# EAGLE board M_D_ext_power_1A (EAGLE 9.6.2)
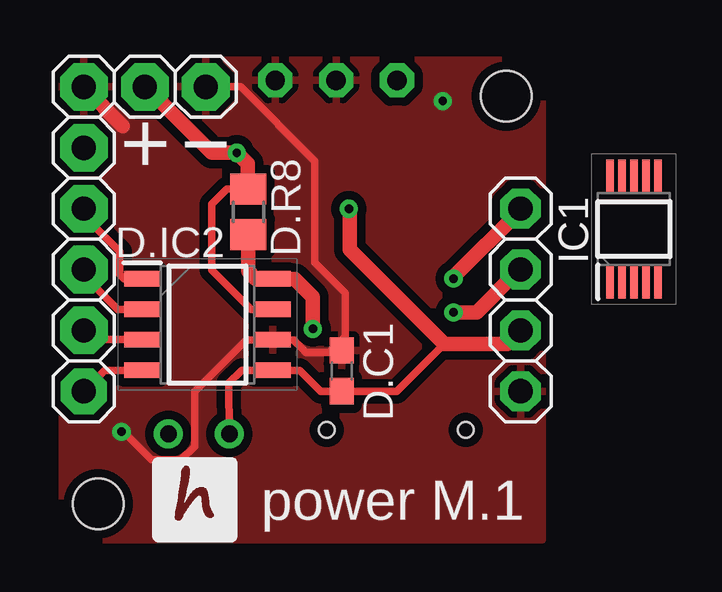
[diagram p0: board, top side]
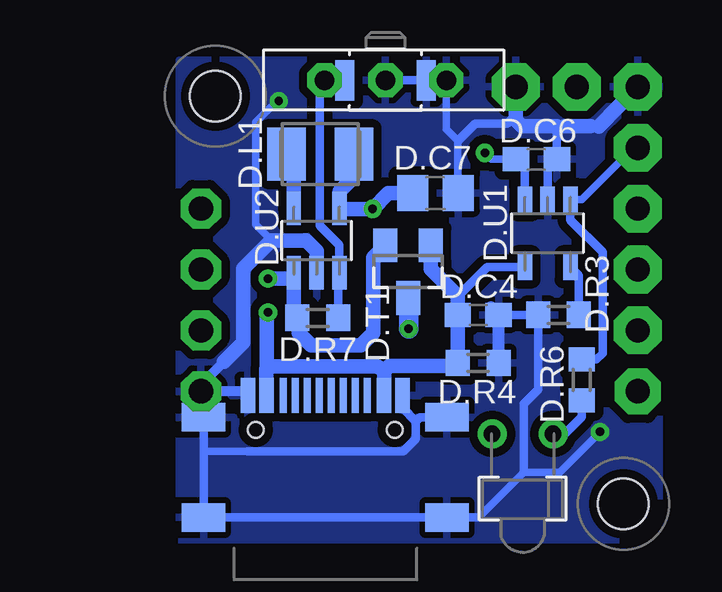
[diagram p1: board, bottom side, seen from below]

No outline drawn. Coordinates in mm, seen from the top.
Copper layers (1*16): Top 0.035mm / dielectric 1.5mm / Bottom 0.035mm
Design rules "default *": minimum track width 10mil, minimum drill 0.35mm, track to track 6mil, track to pad 6mil, pad to pad 6mil, via to via 10mil, smd to smd 10mil, copper to edge 15mil, drill to drill 15mil, minimum pad ring 10mil, minimum via ring 8mil, stop-mask expansion 4mil, vias tented up to drill 0mil, thermal gap 10mil
Holes 2.1 mm at 2,2 19,19

## Footprints (pad centres in the part's own frame; a part is rotated, then mirrored left to right if it is on the bottom)
C0603 = smd 1.1 x 1: 1 -0.85,0; 2 0.85,0
C0805 = smd 1.3 x 1.5: 1 -0.95,0; 2 0.95,0
LED_1.8 = drill 0.7: 1 -1.27,-0.4; 2 1.27,-0.4
SOIC127P600X175-8N = smd 1.528 x 0.65: 1 -2.711,1.905; 2 -2.711,0.635; 3 -2.711,-0.635; 4 -2.711,-1.905; 5 2.711,-1.905; 6 2.711,-0.635; 7 2.711,0.635; 8 2.711,1.905
1X06 = drill 1.016 pad 1.93 octagon: 1 -6.35,0 | drill 1.016 pad 1.981 octagon: 2 -3.81,0; 3 -1.27,0; 4 1.27,0; 5 3.81,0; 6 6.35,0
1X04 = drill 1.016 pad 1.676 octagon: 1 -3.81,0; 2 -1.27,0; 3 1.27,0; 4 3.81,0
L3230M = smd 1.6 x 2.2: 1 -1.4,0; 2 1.4,0
1X02 = drill 1.016 pad 1.981 octagon: 1 -1.27,0; 2 1.27,0
SWITCH = drill 0.8 pad 1.422 octagon: P$1 -2.54,0; P$2 0,0; P$3 2.54,0 | smd 0.8 x 1.7: P$4 -1.7,0; P$5 1.7,0
R0603 = smd 1 x 1.1: 1 -0.85,0; 2 0.85,0
R0805 = smd 1.3 x 1.5: 1 -0.95,0; 2 0.95,0
SOT23 = smd 1 x 1.4: D 0,1.1; G -0.95,-1.1; S 0.95,-1.1
SOT23-5 = smd 0.6 x 1.1: 1 -0.95,-1.45; 2 0,-1.45; 3 0.95,-1.45; 4 0.95,1.35; 5 -0.95,1.35
SOT32-5 = smd 0.6 x 1.4: BP 0.95,1.35; GND 0,-1.35; SHDN 0.95,-1.35; VIN -0.95,-1.35; VOUT -0.95,1.35
SOP50P490X110-10N = smd 1.4 x 0.3: 1 -2.2,1; 2 -2.2,0.5; 3 -2.2,0; 4 -2.2,-0.5; 5 -2.2,-1; 6 2.2,-1; 7 2.2,-0.5; 8 2.2,0; 9 2.2,0.5; 10 2.2,1
USB-C = smd 0.6 x 1.45: A1B12 -3.235,3.825; A4B9 -2.46,3.825; B1A12 3.215,3.825; B4A9 2.44,3.825 | smd 0.3 x 1.45: A5 -1.26,3.825; A6 -0.26,3.825; A7 0.24,3.825; A8 1.24,3.825; B5 1.74,3.825; B6 0.74,3.825; B7 -0.76,3.825; B8 -1.76,3.825 | smd 1.8 x 1.2: SH1 -5.08,2.91; SH2 -5.08,-1.27; SH3 5.06,-1.27; SH4 5.06,2.91 | hole 0.65: 2.88,2.38; -2.9,2.38

## Placement (x,y rotation side)
D.C1  100n  [C0603]  12.14,7.54 270 top
D.C4  4u7  [C0603]  8.05,9.88 180 bottom
D.C6  4u7  [C0603]  5.62,16.37 180 bottom
D.C7  22u  [C0805]  9.83,14.96 180 bottom
D.D1  LED_1.8  [LED_1.8]  6.2,4.52 180 bottom
D.IC2  INA219AIDR  [SOIC127P600X175-8N]  6.55,9.47 0 top
D.J2  [1X06]  1.4,13.04 90 top
D.J3  [1X04]  19.6,10.5 270 top
D.L1  2u2  [L3230M]  14.63,16.59 0 bottom
D.LIPOL  [1X02]  5.21,19.39 180 top
D.ON/OFF/RESET  SWITCH  [SWITCH]  11.91,19.66 0 bottom
D.R3  12k  [R0603]  4.7,9.88 0 bottom
D.R4  100k  [R0603]  8.05,7.87 180 bottom
D.R6  2k2  [R0603]  3.73,7.16 270 bottom
D.R7  100k  [R0603]  14.73,9.75 0 bottom
D.R8  0.1  [R0805]  8.26,14.17 90 top
D.T1  FDV  [SOT23]  10.97,11.68 180 bottom
D.U1  MCP  [SOT23-5]  5.16,13.23 180 bottom
D.U2  TC  [SOT32-5]  14.78,12.98 0 bottom
IC1  MCP73833-AMI_UN  [SOP50P490X110-10N]  24.32,13.46 90 top
U$1  USB-C  [USB-C]  14.41,2.7 0 bottom

## Library data of the parts
D.C1 D.C4 D.C6 D.C7 = rcl; SPICEPREFIX: C
D.D1 D.ON/OFF/RESET U$1 = hugo
D.IC2 = SamacSys_Parts; DESCRIPTION: 26-V, Bidirectional, Zero-Drift, High-Side, I2C Out Current/Power Monitor; HEIGHT: 1.75mm; MANUFACTURER_NAME: Texas Instruments; MANUFACTURER_PART_NUMBER: INA219AIDR; MOUSER_PART_NUMBER: 595-INA219AIDR; MOUSER_PRICE-STOCK: https://www.mouser.co.uk/ProductDetail/Texas-Instruments/INA219AIDR?qs=XGzIaZb%2FFYIE5YcOHTnKDA%3D%3D
D.J2 D.J3 D.LIPOL = pinhead2
D.L1 = rcl; SPICEPREFIX: L
D.R3 D.R4 D.R6-D.R8 = rcl; SPICEPREFIX: R
D.T1 D.U1 D.U2 = !stavebnice03
IC1 = SamacSys_Parts; DESCRIPTION: Microchip MCP73833-AMI/UN, Battery Charge Controller Lithium-Ion, Lithium-Polymer, 10-Pin MSOP; HEIGHT: 1.1mm; MANUFACTURER_NAME: Microchip; MANUFACTURER_PART_NUMBER: MCP73833-AMI/UN; MOUSER_PART_NUMBER: 579-MCP73833-AMI/UN; MOUSER_PRICE-STOCK: https://www.mouser.co.uk/ProductDetail/Microchip-Technology/MCP73833-AMI-UN?qs=Fxu3fLyJv8fd%2FGnsUSC9lg%3D%3D

## Nets
GND: D.C1.1 D.C4.1 D.C6.1 D.C7.1 D.IC2.6 D.J2.6 D.J3.4 D.LIPOL.1 D.ON/OFF/RESET.P$2 D.ON/OFF/RESET.P$3 D.ON/OFF/RESET.P$5 D.R3.1 D.R4.1 D.U1.2 D.U2.GND U$1.A1B12 U$1.B1A12 U$1.SH1 U$1.SH2 U$1.SH3 U$1.SH4
N$1: D.IC2.1 D.J2.4
N$2: D.L1.1 D.U2.VOUT
N$3: D.D1.1 D.R6.2
N$5: D.ON/OFF/RESET.P$1 D.ON/OFF/RESET.P$4 D.R7.2 D.U2.SHDN
N$6: D.IC2.4 D.J2.1
N$7: D.IC2.3 D.J2.2
N$8: D.IC2.8 D.R8.1 D.T1.D
N$9: D.C4.2 D.J3.2 D.R4.2 D.T1.G D.U1.4 U$1.A4B9 U$1.B4A9
N$10: D.IC2.2 D.J2.3
N$11: D.R3.2 D.U1.5
N$12: D.J3.1 D.R7.1 D.T1.S D.U2.VIN
N$13: D.C6.2 D.IC2.7 D.LIPOL.2 D.R8.2 D.U1.3
PA7: D.J2.5 D.R6.1 D.U1.1
VDD: D.C1.2 D.C7.2 D.D1.2 D.IC2.5 D.J3.3 D.L1.2 D.U2.BP

## Tracks (layer width: path | path; a pad name or v marks a point on that pad's centre or on a via)
GND  (via drill 0.35)
  Top 0.305: D.LIPOL.1 7.93,19.39 11.03,16.29 11.03,12.05 12.29,10.79 12.29,8.98 12.14,8.83 | v2.97,5 3.06,5 4.23,3.83 5.45,3.83 6.01,4.4 6.01,6.68 8.17,8.83 9.25,8.83 D.IC2.6 10.13,8.84 10.49,8.48 10.49,8.47 10.66,8.31 11.62,8.31 12.14,8.83 | D.C1.1 12.14,8.83
  Top 0.61: D.J2.6 3.02,17.75
  Bottom 0.305: 17.68,4.2 19.49,4.2 19.49,4.19 | 16.68,12.99 17.32,13.63 17.32,17.92 16.44,18.8 v16.36,18.8 | 8.89,17.14 8.88,17.14 | D.C7.1 8.89,17.14 | D.ON/OFF/RESET.P$3 9.37,17.63 8.89,17.14 | 8.03,1.43 6.14,3.32 4.66,3.32 v2.97,5
  Bottom 0.356: 8.88,17.14 8.17,17.86 6.83,17.86 6.48,18.21 D.LIPOL.1 | D.R3.1 5.49,9.88 | 10.65,5.45 10.65,4.71 11.16,4.2 17.68,4.2 | 10.65,5.45 11.2,6 U$1.B1A12 | 10.65,5.45 10.48,5.61 U$1.SH4 | U$1.SH1 19.49,4.19 U$1.SH2 U$1.SH3 8.03,1.43 | D.C4.1 D.R3.1 | 4.77,17.75 D.C6.1 4.8,16.36 5.16,16.01 D.U1.2 | 6.14,3.32 6.14,6.17 5.55,6.76 D.R3.1 | D.ON/OFF/RESET.P$3 D.ON/OFF/RESET.P$5 D.ON/OFF/RESET.P$2
  Bottom 0.406: 18.64,7.92 19.6,6.96 | D.J3.4 19.59,6.7 17.82,6.7 U$1.A1B12
  Bottom 0.508: D.C4.1 7.2,10.09 | D.C4.1 7.2,10.11 | 7.52,10.2 D.C4.1 | D.C4.1 D.R4.1 7.08,7.75
  Bottom 0.61: D.LIPOL.1 6.48,18 6.23,17.75 4.77,17.75 | 4.45,17.75 3.36,17.75 | 3.03,17.72 D.J2.6 | D.U2.GND 14.78,12.55 15.22,12.99 16.68,12.99 17.84,11.82 17.84,8.73 18.64,7.92 | 8.81,5.84 9.12,5.84 U$1.SH4 9.22,5.74 | 19.6,6.96 D.J3.4 19.6,5.72 U$1.SH1
  pour Top (isolate 0.356): 0.5,20.5 0.5,0.5 20.5,0.5 20.5,20.5
  pour Bottom (isolate 0.356): 0.5,20.5 20.5,20.5 20.5,0.5 0.5,0.5
N$1
  Top 0.305: D.IC2.1 3.08,11.38 2.9,11.56 2.9,12.52 1.4,14.02 D.J2.4
N$2
  Bottom 0.61: D.U2.VOUT 15.73,15.9 16.03,16.2 D.L1.1
N$3
  Bottom 0.356: D.R6.2 3.48,6.06 | 3.4,6.31 D.R6.2 | D.R6.2 3.73,5.63 4.44,4.92 D.D1.1
N$5
  Bottom 0.356: D.R7.2 13.88,11.58 D.U2.SHDN 13.83,12.79 14.64,13.6 14.64,19.47 D.ON/OFF/RESET.P$1 D.ON/OFF/RESET.P$4
N$6
  Top 0.305: D.IC2.4 2.28,7.57 D.J2.1
N$7
  Top 0.305: D.J2.2 1.78,8.85 D.IC2.3
N$8  (via drill 0.35)
  Top 0.61: 8.56,12.92 D.R8.1 8.26,11.7 8.57,11.38 D.IC2.8 10.19,11.38 10.95,10.62 v10.95,9.3 10.95,9.4
  Bottom 0.813: D.T1.D 10.95,10.56 v10.95,9.3
N$9  (via drill 0.35)
  Top 0.61: v16.8,9.98 17.77,9.98 19.32,11.54 19.37,11.54 D.J3.2
  Bottom 0.356: D.U1.4 7.66,11.88 8.9,10.64 D.C4.2
  Bottom 0.508: 11.95,6.51 11.95,7.52 11.95,7.55
  Bottom 0.61: 9.03,10.01 D.C4.2 | 10.02,12.91 D.T1.G 10.02,11.79 8.9,10.67 D.C4.2 | D.C4.2 8.93,9.86 | D.C4.2 D.R4.2 9.03,7.75 11.75,7.75 11.95,7.55 | v16.8,9.98 16.86,9.93 16.86,7.64 | U$1.B4A9 11.97,7.48 | 11.97,7.48 12.23,7.73 16.77,7.73 16.86,7.64 | U$1.A4B9 16.87,7.63 16.86,7.64 | 11.95,7.52 11.97,7.5 11.97,7.48
N$10
  Top 0.305: 1.4,11.43 D.J2.3 1.4,11.52 2.81,10.11 D.IC2.2
N$11
  Bottom 0.356: 3.85,10.03 D.R3.2 3.85,11.53 D.U1.5
N$12  (via drill 0.35)
  Top 0.61: D.J3.1 19.6,14.26 16.8,11.46 v16.8,11.39
  Bottom 0.356: 15.97,11.39 D.U2.VIN
  Bottom 0.61: D.U2.VIN 15.73,9.9 D.R7.1 15.53,9.7 15.53,9.13 15.01,8.61 12.95,8.61 12.43,9.13 12.43,12.28 D.T1.S | v16.8,11.39 15.97,11.39
N$13  (via drill 0.35)
  Top 0.305: 8.23,15.15 D.R8.2 7.35,15.12 6.73,14.51 6.73,11.76 8.38,10.11 D.IC2.7
  Top 0.356: 3.98,19.39 D.LIPOL.2
  Top 0.61: 3.98,19.39 6.73,16.64 v7.77,16.64 8.23,16.18 8.23,15.15
  Bottom 0.305: v7.77,16.64 7.5,16.36 D.C6.2
  Bottom 0.356: 6.13,14.68 D.U1.3 6.11,16 D.C6.2 6.43,16.33
PA7
  Bottom 0.305: D.J2.5 1.56,16.85 3.72,14.68 D.U1.1
  Bottom 0.356: 4.21,14.97 D.U1.1 4.21,13.84 2.87,12.5 2.87,8.27 3.12,8.01 D.R6.1
VDD  (via drill 0.35)
  Top 0.305: D.D1.2 7.44,7.04 7.98,7.57 D.IC2.5 10.39,7.57 11.26,6.69 D.C1.2 | D.C1.2 12.21,6.76 | D.C1.2 12.36,6.91 | D.C1.2 14.44,6.69 16.42,8.67
  Top 0.356: D.C1.2 12.1,6.73
  Top 0.61: D.J3.3 19.04,8.67 17.53,8.67 16.42,8.67 12.49,12.59 12.49,14.26 v12.45,14.3
  Bottom 0.254: 13.35,15.98 13.08,16.25
  Bottom 0.356: 13.08,16.25 13.23,16.1 | v12.45,14.3
  Bottom 0.61: D.L1.2 13.23,16.1 | 13.35,15.98 13.35,15.5 13.82,15.03 13.82,14.35 D.U2.BP 13.83,14.3 v12.45,14.3 11.79,14.96 D.C7.2

## Text on the board
tPlace: + | − | power M.1